# Altium PCB PCB4.PcbDoc
Units mm, origin at the board's own origin, x right, y up, seen from the top; angles counter-clockwise.
Board outline 159.89 x 72.64 mm, 2 copper layers (Top Layer, Bottom Layer); 21 components, 42 nets, 178 pads, 69 vias.
Unrouted connection lines stored in the file: 1.
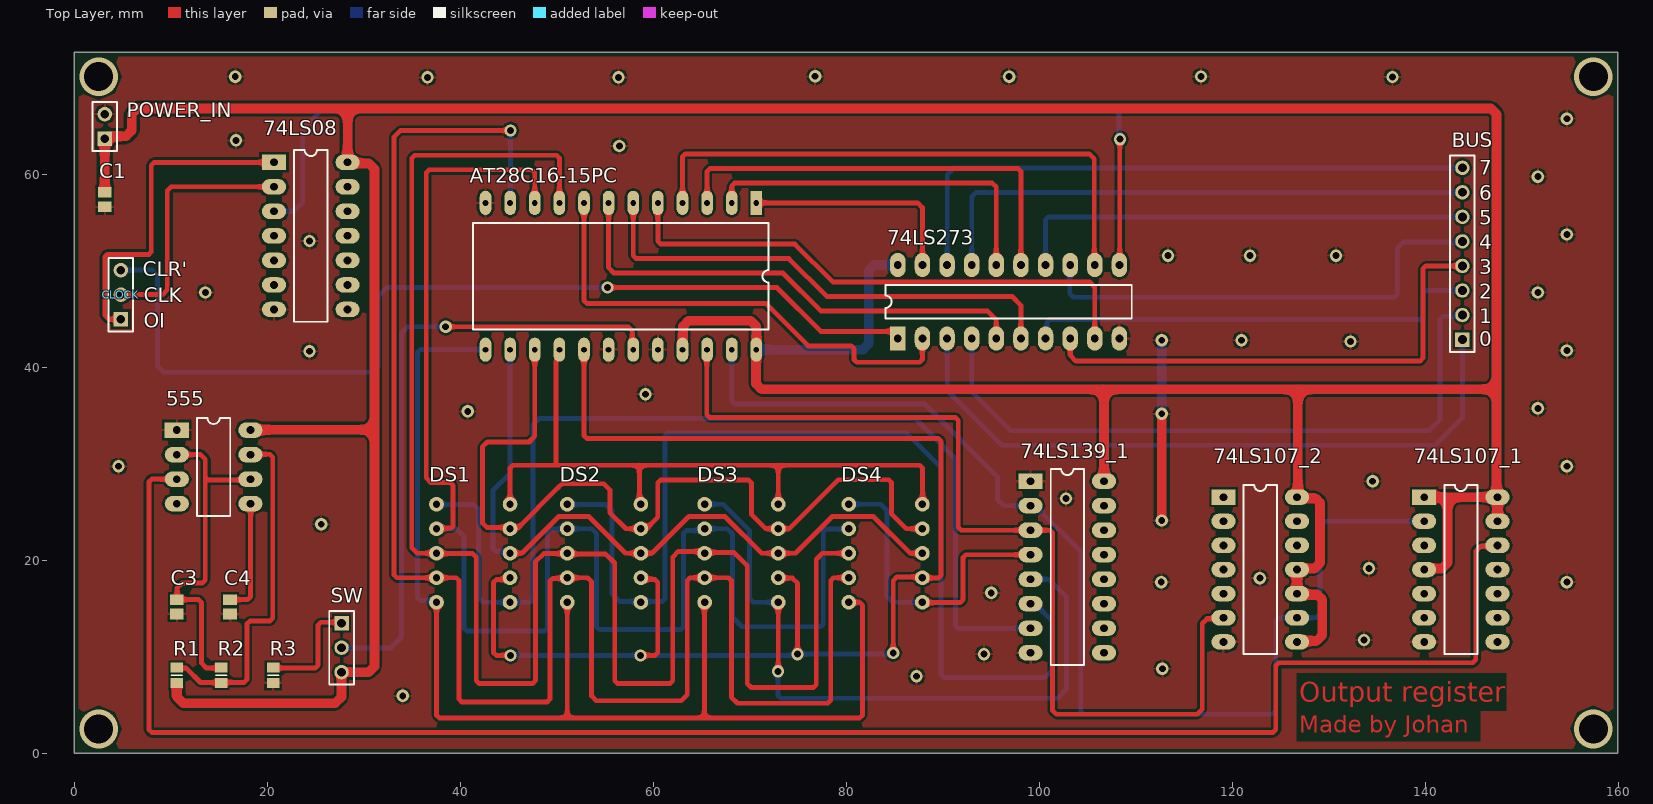
[diagram p0: Top Layer view]
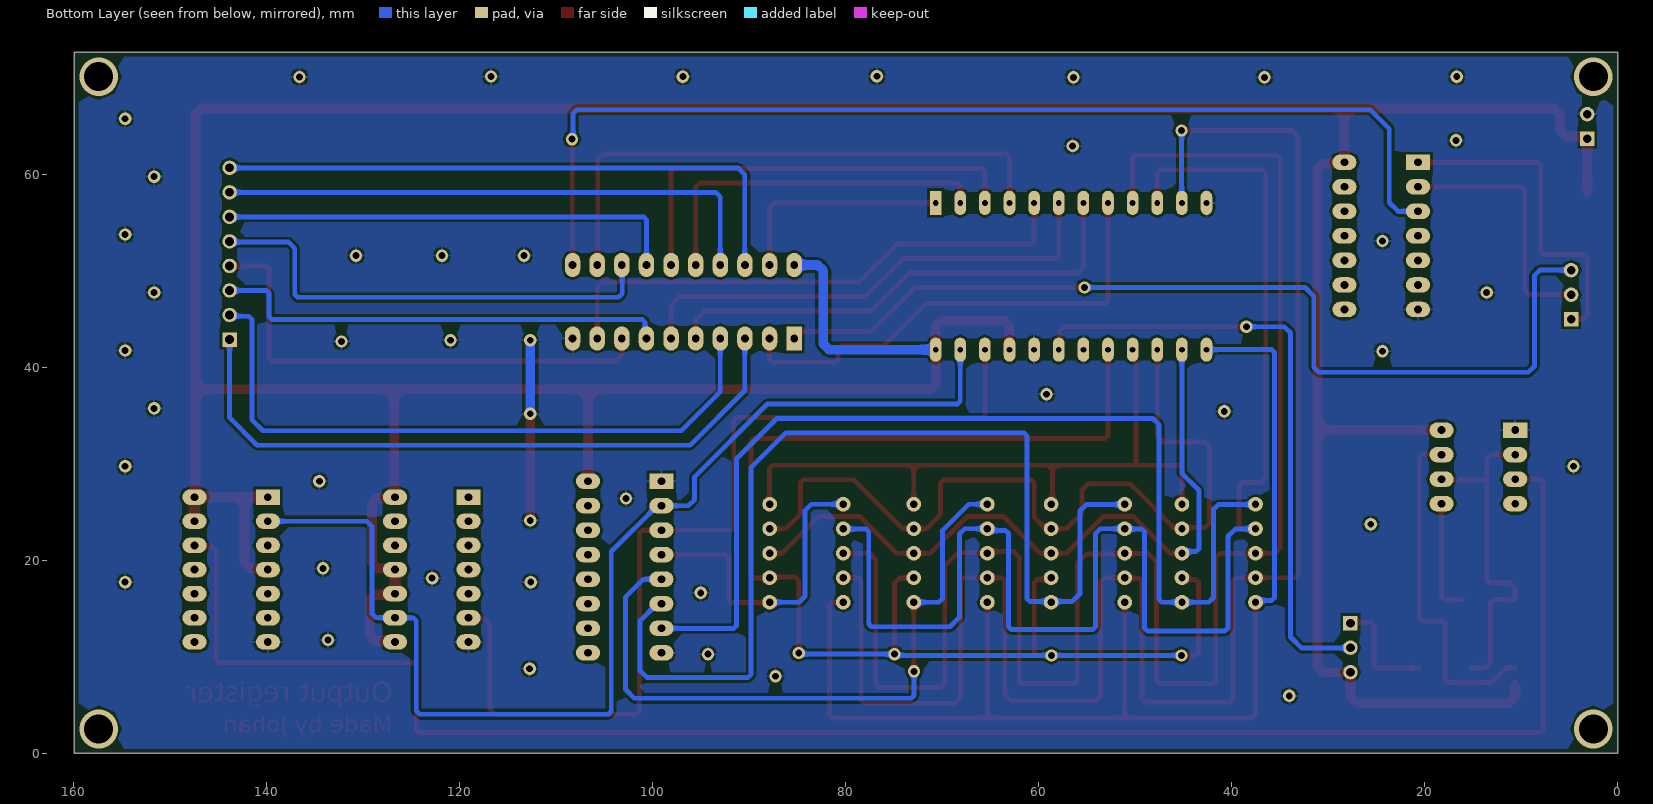
[diagram p1: Bottom Layer view, seen from below]
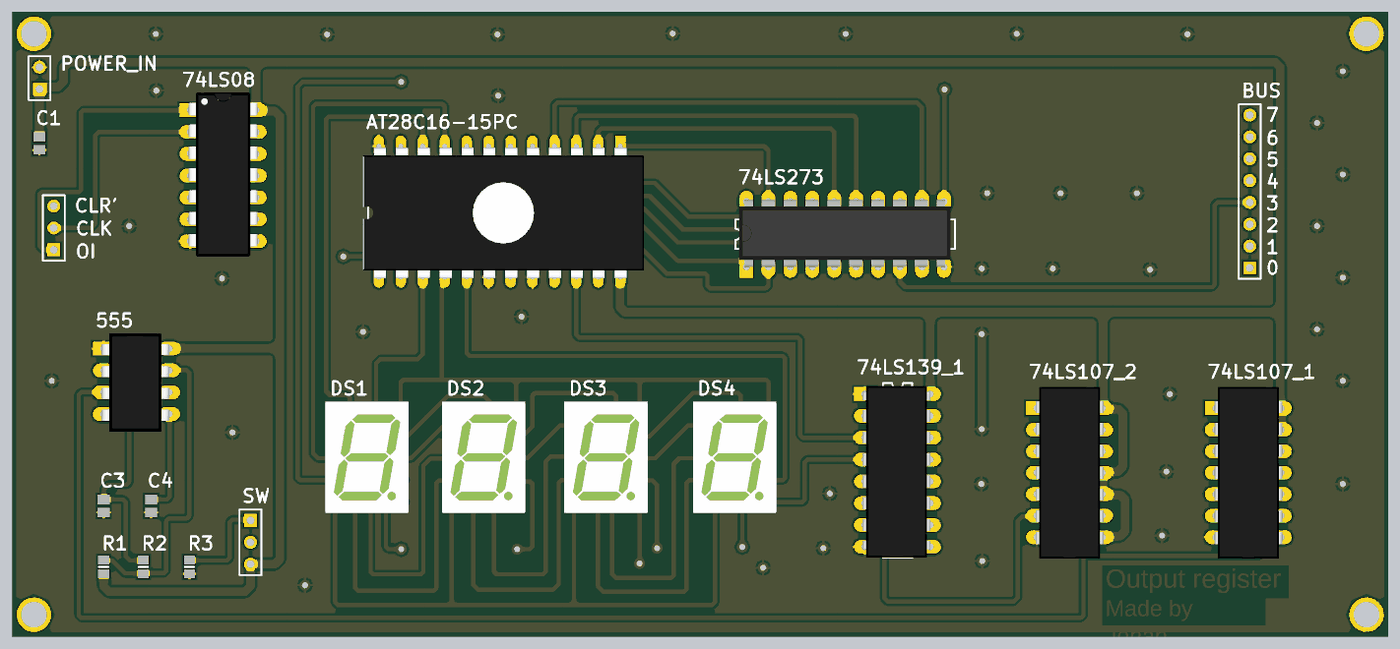
[diagram p2: 3D render of the assembled board from above, using the file's embedded part models]

## Layer stack, top to bottom
Top Solder: solder mask 0.0102, Solder Resist, Dk 3.5
Top Layer: signal copper 0.0356
Dielectric 1: dielectric 0.32, FR-4, Dk 4.8
Bottom Layer: signal copper 0.0356
Bottom Solder: solder mask 0.0102, Solder Resist, Dk 3.5

## Board outline
0,0 159.893,0 159.893,72.644 0,72.644

## Design rules (kind name [scope] priority, off if disabled: settings)
BoardOutlineClearance [All] p1: gap=0.5 ignorepadtopadclearanceinfootprint=FALSE
Clearance [All] p1: gap=0.254 ignorepadtopadclearanceinfootprint=FALSE except(0: Arc-Hole Track-Hole SMDPad-Hole THPad-Hole Via-Hole Fill-Hole Poly-Hole Region-Hole Text-Hole; 0.245: Arc-SMDPad Track-SMDPad; 1: Arc-Arc Arc-Track Track-Track)
PolygonConnect [All] p1: connectstyle=Relief reliefconductorwidth=0.254 reliefentries=4 polygonreliefangle="90 Angle" airgapwidth=0.254
RoutingVias [All] p1: holewidth=0.711 width=1.27 viastyle="Through Hole" minholewidth=0.711 minwidth=1.27 maxholewidth=0.711 maxwidth=1.27
SolderMaskExpansion [All] p1: expansion=0.102 istentingtop=FALSE
Width VCC [InNet('VCC')] p1: maxlimit=2 minlimit=1 preferedwidth=1
Width GND [InNet('GND')] p2: maxlimit=2 minlimit=1 preferedwidth=1
Width [All] p3: maxlimit=1 minlimit=0.5 preferedwidth=0.5
30 further rules are at their usual default settings.

## Classes and differential pairs
component class Sheet1: BUS C1 C3 C4 CLOCK DS1 DS2 DS3 DS4 POWER_IN R1 R2 R3 SW

## Components (designator, comment, footprint, x,y, rotation, side; value= is the part's Value field where it differs from the comment)
74LS08 "DM74LS08N" SN74LS08N 20.708,61.227 r0 top
74LS107_1 "SN74LS107AN" DM74LS107 139.824,26.551 r0 top
74LS107_2 "SN74LS107AN" DM74LS107 119.048,26.551 r0 top
74LS139_1 "SN74LS139AN" SN74LS139AN 99.065,28.209 r0 top
74LS273 "SN74LS273N" SN74LS273N 85.313,42.976 r90 top
555 "NE555P" LM555 10.642,33.493 r0 top
AT28C16-15PC "AT28C16-15PC" AT28C16-15PC 70.662,57.023 r270 top
BUS "Header 8" HDR1X8 143.788,42.872 r90 top
C1 "Cap Pol3" C0805 3.182,57.358 r270 top value=0.1uF
C3 "Cap Pol3" C0805 10.642,15.191 r270 top value=0.01uF
C4 "Cap Pol3" C0805 16.15,15.191 r270 top value=0.01uF
CLOCK "Header 3" HDR1X3 4.845,44.981 r90 top
DS1 "Dpy Red-CA" 7-segment 41.344,20.738 r0 top
DS2 "Dpy Red-CA" 7-segment 54.894,20.738 r0 top
DS3 "Dpy Red-CA" 7-segment 69.116,20.738 r0 top
DS4 "Dpy Red-CA" 7-segment 84.045,20.738 r0 top
POWER_IN "Header 2" HDR1X2 3.182,63.676 r90 top
R1 "Res3" 6-0805_L 10.642,8.099 r270 top value=1K
R2 "Res3" 6-0805_L 15.24,8.099 r90 top value=100K
R3 "Res3" 6-0805_L 20.612,8.099 r270 top value=1K
SW "Header 3" HDR1X3 27.702,13.499 r270 top

## Footprints (in the part's own frame and the unit in brackets; to place one, negate y for a bottom-side part, rotate by r counter-clockwise, add the part's x,y. Pads: shape width x height; smd on the part's side, far side on the other; paste and mask are expansions set on the pad)
6-0805_L [mm] "Chip Resistor, Body 2.0x1.2mm, IPC High Density"
  rect 1x1.3 smd: 1(-0.8,0) 2(0.8,0)
  silkscreen extent 0,-0.55 0,0.55, body extent -1.07,-0.7 1.07,0.7, height 0.7
7-segment [mil]
  round 60 hole 30: 1(-150,200) 2(-150,100) 3(-150,0) 4(-150,-100) 5(-150,-200) 6(150,-200) 7(150,-100) 8(150,0) 9(150,100) 10(150,200)
  body extent -195,-250 187,258, height 295
AT28C16-15PC [mm]
  rect 2.5x1.2 hole 0.6: 1(0,0)
  oval 2.5x1.2 hole 0.6: 2(0,-2.55) 3(0,-5.1) 4(0,-7.65) 5(0,-10.2) 6(0,-12.75) 7(0,-15.3) 8(0,-17.85) 9(0,-20.4) 10(0,-22.95) 11(0,-25.5) 12(0,-28.05) 13(15.2,-28.05) 14(15.2,-25.5) 15(15.2,-22.95) 16(15.2,-20.4) 17(15.2,-17.85) 18(15.2,-15.3) 19(15.2,-12.75) 20(15.2,-10.2) 21(15.2,-7.65) 22(15.2,-5.1) 23(15.2,-2.55) 24(15.2,0)
  silkscreen extent 2.08,-29.32 13.12,1.27, body extent 0.13,-29.91 15.37,2.73, height 6.29
C0805 [mm] "Chip Capacitor, Body 2.0x1.3mm, IPC High Density"
  rect 1.1x1.4 smd: 1(-0.75,0) 2(0.75,0)
  body extent -1.1,-0.72 1.1,0.72, height 1.4
DM74LS107 [mm]
  rect 2.5x1.6 / inner rect 2.5x1.2 / far side rect 2.5x1.6 hole 0.8: 1(0,0)
  oval 2.5x1.6 / inner oval 2.5x1.2 / far side oval 2.5x1.6 hole 0.8: 2(0,-2.5) 3(0,-5) 4(0,-7.5) 5(0,-10) 6(0,-12.5) 7(0,-15) 8(7.6,-15) 9(7.6,-12.5) 10(7.6,-10) 11(7.6,-7.5) 12(7.6,-5) 13(7.6,-2.5) 14(7.6,0)
  silkscreen extent 2.08,-16.25 5.52,1.25, body extent -0.12,-17.49 7.75,2.51, height 5.6
HDR1X2 [mm] "Connector; Header; 2 Position"
  rect 1.5x1.5 hole 0.9: 1(0,0)
  round 1.5 hole 0.9: 2(2.54,0)
  silkscreen extent -1.27,-1.27 3.81,1.27
HDR1X3 [mm] "Connector; Header; 3 Position"
  rect 1.5x1.5 hole 0.9: 1(0,0)
  round 1.5 hole 0.9: 2(2.54,0) 3(5.08,0)
  silkscreen extent -1.27,-1.27 6.35,1.27
HDR1X8 [mm] "Connector; Header; 8 Position"
  rect 1.5x1.5 hole 0.9: 1(0,0)
  round 1.5 hole 0.9: 2(2.54,0) 3(5.08,0) 4(7.62,0) 5(10.16,0) 6(12.7,0) 7(15.24,0) 8(17.78,0)
  silkscreen extent -1.27,-1.27 19.05,1.27
LM555 [mm]
  rect 2.5x1.6 hole 0.8: 1(0,0)
  oval 2.5x1.6 hole 0.8: 2(0,-2.54) 3(0,-5.08) 4(0,-7.62) 5(7.62,-7.62) 6(7.62,-5.08) 7(7.62,-2.54) 8(7.62,0)
  silkscreen extent 2.08,-8.89 5.54,1.27, body extent -0.25,-9.65 14.6,1.78, height 4.69
SN74LS08N [mm]
  rect 2.5x1.6 hole 0.8: 1(0,0)
  oval 2.5x1.6 hole 0.8: 2(0,-2.54) 3(0,-5.08) 4(0,-7.62) 5(0,-10.16) 6(0,-12.7) 7(0,-15.24) 8(7.62,-15.24) 9(7.62,-12.7) 10(7.62,-10.16) 11(7.62,-7.62) 12(7.62,-5.08) 13(7.62,-2.54) 14(7.62,0)
  silkscreen extent 2.08,-16.51 5.54,1.27, body extent -0.19,-17.02 11.18,2.03, height 4.51
SN74LS139AN [mm]
  rect 2.5x1.6 / inner rect 2.5x1.2 / far side rect 2.5x1.6 hole 0.8: 1(0,0)
  oval 2.5x1.6 / inner oval 2.5x1.2 / far side oval 2.5x1.6 hole 0.8: 2(0,-2.54) 3(0,-5.08) 4(0,-7.62) 5(0,-10.16) 6(0,-12.7) 7(0,-15.24) 8(0,-17.78) 9(7.6,-17.78) 10(7.6,-15.24) 11(7.6,-12.7) 12(7.6,-10.16) 13(7.6,-7.62) 14(7.6,-5.08) 15(7.6,-2.54) 16(7.6,0)
  silkscreen extent 2.08,-19.05 5.52,1.27, body extent -0.25,-19.05 7.62,0.95, height 5.6
SN74LS273N [mm]
  rect 2.5x1.6 hole 0.8: 1(0,0)
  oval 2.5x1.6 hole 0.8: 2(0,-2.55) 3(0,-5.1) 4(0,-7.65) 5(0,-10.2) 6(0,-12.75) 7(0,-15.3) 8(0,-17.85) 9(0,-20.4) 10(0,-22.95) 11(7.62,-22.95) 12(7.62,-20.4) 13(7.62,-17.85) 14(7.62,-15.3) 15(7.62,-12.75) 16(7.62,-10.2) 17(7.62,-7.65) 18(7.62,-5.1) 19(7.62,-2.55) 20(7.62,0)
  silkscreen extent 2.08,-24.22 5.54,1.27, body extent 0,-23.73 7.87,0.87, height 4.86

## Part data
74LS08: "IC GATE AND 4CH 2-INP 14-DIP", Case/Package=DIP, High Level Output Current=-400uA, Low Level Output Current=8mA, Manufacturer="ON Semiconductor / Fairchild", Max Operating Temperature=70°C, Max Supply Voltage=5.25V, Min Operating Temperature=0°C, Min Supply Voltage=4.75V, Package Quantity=25, Supplier Part Number 1=512-DM74LS08N, Category="Logic Gates", ComponentLink1Description=https://datasheet.ciiva.com/4825/74ls08-196234-4825713.pdf?src-supplier=Mouser, ComponentLink1URL=https://datasheet.ciiva.com/4825/74ls08-196234-4825713.pdf?src-supplier=Mouser, ComponentLink2Description=https://datasheet.ciiva.com/1877/dm74ls08-1877307.pdf?src-supplier=Digi-Key, ComponentLink2URL=https://datasheet.ciiva.com/1877/dm74ls08-1877307.pdf?src-supplier=Digi-Key, Lead Free="Contains Lead", Logic Function=AND, Manufacturer Part Number=DM74LS08N, Mount="Through Hole", Number of Circuits=4, Number of Gates=4, Number of Inputs=2, Number of Pins=14, Packaging=Rail/Tube, Propagation Delay=18ns, RoHS=Yes, Supplier 1=Mouser
74LS107_1 74LS107_2: "Flip Flop JK-Type Neg-Edge 2-Element 14-Pin PDIP Tube", Case/Package=PDIP, Frequency=45MHz, High Level Output Current=-400uA, Low Level Output Current=8mA, Manufacturer="Texas Instruments", Max Operating Temperature=70°C, Max Supply Voltage=5.25V, Min Operating Temperature=0°C, Min Supply Voltage=4.75V, Nominal Supply Current=100uA, Operating Supply Voltage=5V, Package Quantity=25, Supplier Part Number 1=95M4428, Clock Edge Trigger Type="Negative Edge,Positive Edge", ComponentLink1Description=https://www.distrelec.biz/Web/Downloads/_t/ds/sn74ls107a_eng_tds.pdf?mime=application%2Fpdf&src-supplier=Distrelec, ComponentLink1URL=https://www.distrelec.biz/Web/Downloads/_t/ds/sn74ls107a_eng_tds.pdf?mime=application%2Fpdf&src-supplier=Distrelec, ComponentLink2Description=http://focus.ti.com/lit/ds/symlink/sn74107.pdf?src-supplier=Avnet+Europe, ComponentLink2URL=http://focus.ti.com/lit/ds/symlink/sn74107.pdf?src-supplier=Avnet+Europe, ComponentLink3Description=http://www.ti.com/general/docs/lit/getliterature.tsp?genericPartNumber=SN74LS107A&&fileType=pdf&src-supplier=Avnet, ComponentLink3URL=http://www.ti.com/general/docs/lit/getliterature.tsp?genericPartNumber=SN74LS107A&&fileType=pdf&src-supplier=Avnet, ComponentLink4Description=https://source.z2data.com/2016/10/12/6/26/54/563/639426/sn74107.pdf?src-supplier=Digi-Key, ComponentLink4URL=https://source.z2data.com/2016/10/12/6/26/54/563/639426/sn74107.pdf?src-supplier=Digi-Key, ComponentLink5Description=http://www.farnell.com/datasheets/1967736.pdf?src-supplier=Element14, ComponentLink5URL=http://www.farnell.com/datasheets/1967736.pdf?src-supplier=Element14, ComponentLink6Description=https://www.verical.com/server-webapp/html/getDatasheet?partID=250176&src-supplier=Verical, ComponentLink6URL=https://www.verical.com/server-webapp/html/getDatasheet?partID=250176&src-supplier=Verical, Height=4.57mm, Lead Free="Lead Free", Length=19.69mm, Logic Function=Flip-Flop,JK-Type, Manufacturer Part Number=SN74LS107AN, Max Frequency=45MHz, Mount="Through Hole", Number of Bits=2, Number of Bits per Element=1, Number of Circuits=2, Number of Elements=2, Number of Input Lines=4, Number of Output Lines=2, Number of Pins=14, Output Current=8mA, Output Type=TTL, Packaging=Rail/Tube, Polarity=Non-Inverting, Propagation Delay=20ns, Radiation Hardening=No, REACH SVHC="No SVHC", Stock 1=0, Supplier 1=Newark, Turn-On Delay Time=15ns, Weight=0.032734oz, Width=6.6mm
74LS139_1: "TEXAS INSTRUMENTS         SN74LS139AN            IC, DECODER/DEMUX, 74LS139", Case/Package=PDIP, High Level Output Current=-400uA, Low Level Output Current=8mA, Manufacturer="Texas Instruments", Max Operating Temperature=70°C, Max Power Dissipation=200mW, Max Supply Voltage=5.25V, Min Operating Temperature=0°C, Min Supply Voltage=4.75V, Nominal Supply Current=100uA, Operating Supply Voltage=5V, Package Quantity=25, Supplier Part Number 1=308253, Bandwidth=35MHz, ComponentLink1Description=http://www.farnell.com/datasheets/2018724.pdf?src-supplier=Element14, ComponentLink1URL=http://www.farnell.com/datasheets/2018724.pdf?src-supplier=Element14, ComponentLink2Description=https://www.distrelec.biz/Web/Downloads/57/06/lm645706.pdf?mime=application%2Fpdf&src-supplier=Distrelec, ComponentLink2URL=https://www.distrelec.biz/Web/Downloads/57/06/lm645706.pdf?mime=application%2Fpdf&src-supplier=Distrelec, ComponentLink3Description=http://www.ti.com/lit/ds/symlink/sn74s139a.pdf?src-supplier=Digi-Key, ComponentLink3URL=http://www.ti.com/lit/ds/symlink/sn74s139a.pdf?src-supplier=Digi-Key, ComponentLink4Description=https://www.verical.com/server-webapp/html/getDatasheet?partID=83287&src-supplier=Verical, ComponentLink4URL=https://www.verical.com/server-webapp/html/getDatasheet?partID=83287&src-supplier=Verical, Height=4.57mm, Independent Circuits=2, Lead Free="Lead Free", Length=19.3mm, Logic Function=Demultiplexer,Decoder, Manufacturer Part Number=SN74LS139AN, Mount="Through Hole", Number of Bits=4, Number of Channels=2, Number of Circuits=2, Number of Elements=2, Number of Input Lines=2, Number of Inputs=2, Number of Output Lines=4, Number of Outputs=4, Number of Pins=16, Packaging=Rail/Tube, Polarity=Inverting, Propagation Delay=33ns, Radiation Hardening=No, REACH SVHC="No SVHC", Stock 1=0, Supplier 1=RSComponents, Supply Type=Single, Throw Configuration=DP4T, Turn-On Delay Time=38ns, Weight=0.03357oz, Width=6.35mm
74LS273: "IC D-TYPE POS TRG SNGL 20DIP", Case/Package=PDIP, Frequency=40MHz, High Level Output Current=-400uA, Low Level Output Current=8mA, Manufacturer="Texas Instruments", Max Operating Temperature=70°C, Max Supply Voltage=5.25V, Min Operating Temperature=0°C, Min Supply Voltage=4.75V, Operating Supply Voltage=5V, Package Quantity=20, Supplier Part Number 1=0308354, Clock Edge Trigger Type="Positive Edge", ComponentLink1Description=https://www.distrelec.biz/Web/Downloads/14/_e/kg645614_E.pdf?mime=application%2Fpdf&src-supplier=Distrelec, ComponentLink1URL=https://www.distrelec.biz/Web/Downloads/14/_e/kg645614_E.pdf?mime=application%2Fpdf&src-supplier=Distrelec, ComponentLink2Description=http://focus.ti.com/lit/ds/symlink/sn74273.pdf?src-supplier=Avnet+Europe, ComponentLink2URL=http://focus.ti.com/lit/ds/symlink/sn74273.pdf?src-supplier=Avnet+Europe, ComponentLink3Description=http://www.ti.com/lit/ds/symlink/sn74ls273.pdf?src-supplier=Digi-Key, ComponentLink3URL=http://www.ti.com/lit/ds/symlink/sn74ls273.pdf?src-supplier=Digi-Key, ComponentLink4Description=https://www.verical.com/server-webapp/html/getDatasheet?partID=250181&src-supplier=Verical, ComponentLink4URL=https://www.verical.com/server-webapp/html/getDatasheet?partID=250181&src-supplier=Verical, ComponentLink5Description=http://datasheet.iiic.cc/texas_instruments/SN74LS273N.pdf?src-supplier=IIIC, ComponentLink5URL=http://datasheet.iiic.cc/texas_instruments/SN74LS273N.pdf?src-supplier=IIIC, ComponentLink6Description=http://www.produktinfo.conrad.com/datenblaetter/175000-199999/175129-da-01-en-LOGIK_IC_SN_74_LS_273_N_DIP20__TID.pdf?src-supplier=Conrad, ComponentLink6URL=http://www.produktinfo.conrad.com/datenblaetter/175000-199999/175129-da-01-en-LOGIK_IC_SN_74_LS_273_N_DIP20__TID.pdf?src-supplier=Conrad, ComponentLink7Description=http://www.produktinfo.conrad.com/datenblaetter/1000000-1099999/001016947-da-01-en-IC_DTPE_POS_TRG_S_SN74LS273N_PDIP_20_TID.pdf?src-supplier=Conrad, ComponentLink7URL=http://www.produktinfo.conrad.com/datenblaetter/1000000-1099999/001016947-da-01-en-IC_DTPE_POS_TRG_S_SN74LS273N_PDIP_20_TID.pdf?src-supplier=Conrad, Height=4.57mm, Lead Free="Contains Lead", Length=24.33mm, Logic Function=D-Type,Flip-Flop, Manufacturer Part Number=SN74LS273N, Max Frequency=40MHz, Mount="Through Hole", Number of Bits=8, Number of Bits per Element=8, Number of Channels=8, Number of Circuits=8, Number of Elements=1, Number of Input Lines=2, Number of Output Lines=1, Number of Pins=20, Output Current=8mA, Output Type=TTL, Packaging=Rail/Tube, Polarity=Non-Inverting, Propagation Delay=27ns, Radiation Hardening=No, REACH SVHC="No SVHC", Stock 1=0, Supplier 1=RSComponents, Turn-On Delay Time=17ns, Weight=0.042297oz, Width=6.35mm
555: "TEXAS INSTRUMENTS         NE555P            TIMER SINGLE PRECISION,DIP8 ,0.5MHZ", Case/Package=PDIP, Current Rating=10mA, Frequency=500kHz, High Level Output Current=-200mA, Low Level Output Current=200mA, Manufacturer="Texas Instruments", Max Operating Temperature=70°C, Max Supply Voltage=16V, Min Operating Temperature=0°C, Min Supply Voltage=4.5V, Nominal Supply Current=2mA, Operating Supply Voltage=5V, Package Quantity=50, Quiescent Current=15mA, Supplier Part Number 1=296-NE555P-ND, Category="Clock and Timing", ComponentLink1Description=https://datasheet.ciiva.com/19457/904085-19457361.pdf?src-supplier=Jameco, ComponentLink1URL=https://datasheet.ciiva.com/19457/904085-19457361.pdf?src-supplier=Jameco, ComponentLink2Description=https://datasheet.ciiva.com/1139/sa555-1139904.pdf?src-supplier=Element14, ComponentLink2URL=https://datasheet.ciiva.com/1139/sa555-1139904.pdf?src-supplier=Element14, ComponentLink3Description=https://datasheet.ciiva.com/26325/152184-da-01-en-ne555p-timer-tid-26325915.pdf?src-supplier=Conrad, ComponentLink3URL=https://datasheet.ciiva.com/26325/152184-da-01-en-ne555p-timer-tid-26325915.pdf?src-supplier=Conrad, ComponentLink4Description=https://datasheet.ciiva.com/1147/1764032-1147750.pdf?src-supplier=Newark, ComponentLink4URL=https://datasheet.ciiva.com/1147/1764032-1147750.pdf?src-supplier=Newark, ComponentLink5Description=https://datasheet.ciiva.com/14094/ne555-series-eng-tds-14094950.pdf?src-supplier=Distrelec, ComponentLink5URL=https://datasheet.ciiva.com/14094/ne555-series-eng-tds-14094950.pdf?src-supplier=Distrelec, ComponentLink6Description=https://datasheet.ciiva.com/14274/ne555-14274456.pdf?src-supplier=Avnet, ComponentLink6URL=https://datasheet.ciiva.com/14274/ne555-14274456.pdf?src-supplier=Avnet, ComponentLink7Description=https://datasheet.ciiva.com/15152/getdatasheetpartid-248510-15152620.pdf?src-supplier=Verical, ComponentLink7URL=https://datasheet.ciiva.com/15152/getdatasheetpartid-248510-15152620.pdf?src-supplier=Verical, ComponentLink8Description=https://datasheet.ciiva.com/1233/ne555-1233454.pdf?src-supplier=Digi-Key, ComponentLink8URL=https://datasheet.ciiva.com/1233/ne555-1233454.pdf?src-supplier=Digi-Key, ComponentLink9Description=https://datasheet.ciiva.com/26228/ne555-26228892.pdf?src-supplier=Avnet+Europe, ComponentLink9URL=https://datasheet.ciiva.com/26228/ne555-26228892.pdf?src-supplier=Avnet+Europe, Contact Plating=Gold, Height=4.57mm, Lead Free="Lead Free", Length=9.81mm, Manufacturer Part Number=NE555P, Mount="Through Hole", Number of Pins=8, Number of Timers/Counters=1, Operating Supply Current=10mA, Packaging=Rail/Tube, Pricing 1="1=0,45000, 10=0,34200, 25=0,30800, 100=0,21280, 250=0,17920, 500=0,14560, 1000=0,11200, 2500=0,10080, 5000=0,09520 (USD)", Radiation Hardening=No, REACH SVHC="No SVHC", RoHS=Yes, Stock 1=8033, Supplier 1=Digi-Key, Weight=0.015535oz, Width=6.35mm
AT28C16-15PC: Case/Package=DIP, Frequency=150GHz, Manufacturer="Microchip / Atmel", Max Operating Temperature=70°C, Max Supply Voltage=5.5V, Min Operating Temperature=0°C, Min Supply Voltage=4.5V, Nominal Supply Current=30mA, Operating Supply Voltage=5V, Package Quantity=16, Supplier Part Number 1=AT28C16-15PC-ND, Access Time=150ns, ComponentLink1Description=http://www.atmel.com/Images/doc0540.pdf?src-supplier=Digi-Key, ComponentLink1URL=http://www.atmel.com/Images/doc0540.pdf?src-supplier=Digi-Key, ComponentLink2Description=http://components.arrow.com/part/dataview/66884S2427492N3744?src-supplier=Arrow, ComponentLink2URL=http://components.arrow.com/part/dataview/66884S2427492N3744?src-supplier=Arrow, Density=16Kb, Interface=Parallel, Lead Free="Contains Lead", Manufacturer Part Number=AT28C16-15PC, Memory Size=16Kb, Memory Type=EEPROM, Mount="Through Hole", Number of Pins=24, Packaging=Rail/Tube, Stock 1=0, Supplier 1=Digi-Key
BUS: "Header, 8-Pin", LatestRevisionDate=17-Jul-2002, LatestRevisionNote="Re-released for DXP Platform.", Publisher="Altium Limited"
C1 C3 C4: "Polarized Capacitor (Surface Mount)", LatestRevisionDate=29-May-2009, LatestRevisionNote="IPC-7351 Footprint Added.", PackageDescription="Chip Capacitor", PackageReference=C0805, Published=8-Jun-2000, Publisher="Altium Limited"
CLOCK SW: "Header, 3-Pin", LatestRevisionDate=17-Jul-2002, LatestRevisionNote="Re-released for DXP Platform.", Publisher="Altium Limited"
DS1 DS2 DS3 DS4: "7.62 mm Black Surface HER 7-Segment Display: CA, RH DP", Colour="High Efficiency Red (HER)", ComponentLink1Description="Manufacturer Link", ComponentLink1URL=http://www.agilent.com/, DatasheetVersion=19-Feb-2002, LatestRevisionDate=17-Dec-2003, LatestRevisionNote="Schematic revised, PCB Footprint replaced.", MinimumIntensity="360 ucd", Note="IF = 5 mA", PackageDescription="LED, 7-Segment Display, 7.62 mm, RHD; 10 Leads; Row Space 5.08 mm; Pitch 2.54 mm", PackageReference=A, PackageVersion=11-Feb-2002, Published=8-Jun-2000, Publisher="Altium Limited"
POWER_IN: "Header, 2-Pin", LatestRevisionDate=17-Jul-2002, LatestRevisionNote="Re-released for DXP Platform.", Publisher="Altium Limited"
R1 R2 R3: "Resistor", LatestRevisionDate=29-May-2009, LatestRevisionNote="IPC-7351 Footprint Added.", PackageDescription="Chip Resistor", PackageReference=J1-0603, Published=8-Jun-2000, Publisher="Altium Limited"

## Via types
v1: diameter 1.27, hole 0.711, Top Layer to Bottom Layer, tented both sides, 65 vias
v2: diameter 4, hole 3, Top Layer to Bottom Layer, 4 vias

## Nets (pads, with @x,y where several pads share a name; then routed paths per layer and width w, separated by ;. In a path a pad name is that pad's centre, name@x,y a point inside that pad or via, vN(x,y) a via of type N, cw(c..) or ccw(c..) an arc to the next point about the centre after c; other vN are vias at no path point)
GND: 74LS08.7 74LS107_1.7 74LS107_2.7 74LS139_1.1 74LS139_1.8 74LS273.10 555.1 AT28C16-15PC.12 AT28C16-15PC.18 AT28C16-15PC.20 C1.2 C3.2 C4.2 POWER_IN.2 R3.2 | length 18.7
  Top Layer w1: v1(112.649,24.13) v1(112.649,35.179)
  Bottom Layer w1: v1(112.649,35.179) v1(112.649,42.799)
  other v1: 34.036,5.969 87.249,8.001 112.71,8.777 94.234,10.287 133.6,11.743 133.6,11.743 94.996,16.637 112.6,17.743 112.6,17.743 154.6,17.743 154.6,17.743 122.809,18.161 134.112,19.177 25.6,23.743 25.6,23.743 102.743,26.416 134.493,28.194 4.6,29.743 4.6,29.743 154.6,29.743 154.6,29.743 40.767,35.433 151.6,35.743 151.6,35.743 59.182,37.211 24.384,41.656 154.6,41.743 154.6,41.743 132.207,42.672 120.904,42.799 13.6,47.743 13.6,47.743 151.6,47.743 151.6,47.743 113.284,51.562 121.793,51.562 130.683,51.562 24.384,53.086 154.6,53.743 154.6,53.743 151.6,59.743 151.6,59.743 56.475,62.909 16.764,63.5 154.6,65.743 154.6,65.743 36.603,70.022 56.397,70.022 136.544,70.06 16.698,70.097 96.844,70.097 116.713,70.104 76.752,70.134
Net74LS08_1: 74LS08.1 CLOCK.1 | length 34.8
  Top Layer w0.5: CLOCK.1 3.598,44.981 3.182,45.397 3.182,51.442 3.429,51.689 7.747,51.689 8.001,51.943 8.001,60.921 8.294,61.214 20.695,61.214 74LS08.1 74LS08.1@20.679,61.256
Net74LS08_2: 74LS08.2 CLOCK.2 | length 26.7
  Top Layer w0.5: CLOCK.2 9.167,47.521 9.652,48.006 9.652,58.293 10.046,58.687 74LS08.2 74LS08.2@20.556,58.535
Net74LS08_3: 74LS08.3 74LS273.11 | length 112.4
  Top Layer w0.5: 74LS273.11 108.297,50.63 108.297,63.593 v1(108.331,63.627)
  Bottom Layer w0.5: 74LS08.3 22.77,56.147 23.688,57.065 23.688,64.709 25.654,66.675 107.823,66.675 108.204,66.294 108.204,63.754 v1(108.331,63.627) ; 74LS273.11@108.204,50.655 74LS273.11
Net74LS107_1_2: 74LS107_1.2 74LS107_2.9 74LS139_1.2 AT28C16-15PC.23 | length 120.6
  Bottom Layer w0.5: AT28C16-15PC.23 68.112,36.488 68.405,36.195 88.086,36.195 95.631,28.65 95.631,26.289 96.266,25.654 99.05,25.654 74LS139_1.2 99.515,25.669 104.267,20.917 104.267,4.357 104.56,4.064 124.079,4.064 124.46,4.445 124.46,13.759 124.753,14.051 74LS107_2.9 128.605,14.051 129.032,14.478 129.032,23.495 129.588,24.051 74LS107_1.2
Net74LS107_1_12: 74LS107_1.12 555.3 | length 187
  Top Layer w0.5: 555.3 8.04,28.413 7.747,28.12 7.747,2.476 8.04,2.183 124.167,2.183 124.46,2.476 124.46,9.105 124.753,9.398 144.868,9.398 145.161,9.691 145.161,20.955 145.669,21.463 147.336,21.463 74LS107_1.12
Net74LS107_2_6: 74LS107_2.6 74LS139_1.3 AT28C16-15PC.22 | length 99.7
  Top Layer w0.5: AT28C16-15PC.22 65.532,41.793 65.532,35.091 65.825,34.798 91.274,34.798 91.567,34.505 91.567,23.422 91.86,23.129 101.053,23.129 101.346,22.836 101.346,4.445 101.727,4.064 116.332,4.064 116.84,4.572 116.84,13.462 117.348,13.97 118.967,13.97 74LS107_2.6
Net74LS139_1_4: 74LS139_1.4 DS4.1 DS4.6 | length 32.9
  Top Layer w0.5: DS4.6 87.893,15.621 91.782,15.621 92.075,15.914 92.075,20.296 92.368,20.589 74LS139_1.4
  Bottom Layer w0.5: DS4.1 83.529,25.818 84.2,25.147 84.2,18.044 84.201,18.043 84.201,16.256 84.799,15.658 DS4.6
Net74LS139_1_5: 74LS139_1.5 DS3.1 DS3.6 | length 70.1
  Top Layer w0.5: v1(72.898,8.509) 72.926,8.537 DS3.6
  Bottom Layer w0.5: DS3.1 67.235,25.818 69.965,23.088 69.965,16.014 70.321,15.658 DS3.6 ; v1(72.898,8.509) 72.898,6.008 73.191,5.715 101.854,5.715 102.767,6.628 102.767,16.232 100.95,18.049 74LS139_1.5
Net74LS139_1_6: 74LS139_1.6 DS2.1 DS2.6 | length 107.9
  Bottom Layer w0.5: DS2.1 51.121,25.781 55.052,25.781 55.709,25.123 55.709,16.554 56.515,15.748 58.704,15.748 60.921,15.748 61.214,16.041 61.214,32.902 61.507,33.195 86.185,33.195 89.789,29.591 89.789,8.167 90.082,7.874 100.584,7.874 101.267,8.557 101.267,13.757 99.515,15.509 74LS139_1.6
Net74LS139_1_7: 74LS139_1.7 DS1.1 DS1.6 | length 108.7
  Bottom Layer w0.5: DS1.1 37.572,25.781 41.402,25.781 41.886,25.297 41.886,16.153 42.381,15.658 47.229,15.658 47.522,15.951 47.522,34.06 48.157,34.695 87.098,34.695 91.289,30.504 91.289,13.247 91.582,12.954 99.05,12.954 74LS139_1.7
Net74LS273_1: 74LS273.1 CLOCK.3 | length 100.6
  Top Layer w0.5: v1(55.245,48.26) 72.795,48.26 77.343,43.712 84.763,43.712 85.313,43.162 74LS273.1
  Bottom Layer w0.5: CLOCK.3 8.105,50.061 8.636,49.53 8.636,40.132 9.29,39.478 30.969,39.478 31.496,40.005 31.496,47.371 32.385,48.26 v1(55.245,48.26)
Net74LS273_2: 74LS273.2 AT28C16-15PC.8 | length 50.8
  Top Layer w0.5: AT28C16-15PC.8 52.812,46.902 53.105,46.609 71.628,46.609 76.025,42.212 80.479,42.212 80.772,41.919 80.772,40.806 81.065,40.513 87.57,40.513 87.863,40.806 74LS273.2
Net74LS273_3: 74LS273.3 BUS.1 | length 70.4
  Bottom Layer w0.5: 74LS273.3 90.424,42.965 90.424,37.592 96.087,31.929 140.945,31.929 143.788,34.772 BUS.1
Net74LS273_4: 74LS273.4 BUS.2 | length 69
  Bottom Layer w0.5: 74LS273.4 92.964,42.975 92.964,37.465 97,33.429 140.324,33.429 141.478,34.583 141.478,44.958 141.807,45.287 143.663,45.287 BUS.2
Net74LS273_5: 74LS273.5 AT28C16-15PC.7 | length 51
  Top Layer w0.5: AT28C16-15PC.7 55.362,50.302 55.904,49.76 73.416,49.76 77.334,45.842 94.59,45.842 95.513,44.919 74LS273.5
Net74LS273_6: 74LS273.6 AT28C16-15PC.6 | length 51.2
  Top Layer w0.5: AT28C16-15PC.6 57.912,51.553 58.205,51.26 74.038,51.26 77.956,47.342 97.14,47.342 98.063,46.419 74LS273.6
Net74LS273_7: 74LS273.7 BUS.3 | length 47.5
  Bottom Layer w0.5: 74LS273.7 100.768,43.131 100.768,44.665 101.061,44.958 139.407,44.958 139.7,45.251 139.7,47.659 139.993,47.952 BUS.3
Net74LS273_8: 74LS273.8 BUS.4 | length 52.1
  Top Layer w0.5: 74LS273.8 103.163,41.236 103.759,40.64 139.407,40.64 139.7,40.933 139.7,50.199 139.993,50.492 BUS.4
Net74LS273_9: 74LS273.9 AT28C16-15PC.5 | length 56.5
  Top Layer w0.5: AT28C16-15PC.5 60.462,53.053 60.755,52.76 74.659,52.76 78.577,48.842 105.172,48.842 105.713,48.302 74LS273.9
Net74LS273_12: 74LS273.12 AT28C16-15PC.4 | length 58.8
  Top Layer w0.5: AT28C16-15PC.4 63.012,61.81 63.305,62.103 105.156,62.103 105.664,61.595 105.664,50.645 74LS273.12
Net74LS273_13: 74LS273.13 BUS.5 | length 49
  Bottom Layer w0.5: 74LS273.13 103.124,50.557 103.124,47.625 103.505,47.244 136.74,47.244 137.033,47.537 137.033,52.324 137.668,52.959 143.716,52.959 BUS.5
Net74LS273_14: 74LS273.14 BUS.6 | length 48
  Bottom Layer w0.5: 74LS273.14 100.613,55.279 100.905,55.572 BUS.6
Net74LS273_15: 74LS273.15 AT28C16-15PC.3 | length 45.7
  Top Layer w0.5: AT28C16-15PC.3 65.562,60.286 65.855,60.579 97.77,60.579 98.063,60.286 74LS273.15
Net74LS273_16: 74LS273.16 AT28C16-15PC.2 | length 37.5
  Top Layer w0.5: AT28C16-15PC.2 68.112,58.786 68.405,59.079 95.099,59.079 95.504,58.674 95.504,50.605 74LS273.16
Net74LS273_17: 74LS273.17 BUS.7 | length 58.1
  Bottom Layer w0.5: 74LS273.17 92.964,50.597 92.964,57.658 93.418,58.112 BUS.7
Net74LS273_18: 74LS273.18 BUS.8 | length 63
  Bottom Layer w0.5: 74LS273.18 90.424,50.607 90.424,59.944 91.132,60.652 BUS.8
Net74LS273_19: 74LS273.19 AT28C16-15PC.1 | length 23.3
  Top Layer w0.5: AT28C16-15PC.1 87.376,57.023 87.863,56.536 74LS273.19
Net555_2: 555.2 555.6 C3.1 R2.2 | length 36.2
  Top Layer w0.5: 555.2 13.116,30.953 13.589,30.48 13.589,28.614 ; R2.2@15.24,8.849 13.719,8.849 13.208,9.36 13.208,15.621 12.888,15.941 C3.1 10.668,15.968 10.668,17.145 11.176,17.653 13.296,17.653 13.589,17.946 13.589,28.614 ; 555.6 18.17,28.321 13.882,28.321 13.589,28.614
Net555_5: 555.5 C4.1 | length 11.9
  Top Layer w0.5: C4.1 17.973,15.941 18.288,16.256 18.288,25.846 555.5
Net555_7: 555.7 R1.1 R2.1 | length 35.8
  Top Layer w0.5: R1.1@10.642,8.849 11.598,8.849 13.098,7.349 15.24,7.349 15.861,7.349 15.877,7.366 17.614,7.366 17.907,7.659 17.907,13.423 18.2,13.716 20.281,13.716 20.574,14.009 20.574,30.695 20.281,30.988 18.297,30.988 555.7
NetAT28C16-15PC_9: AT28C16-15PC.9 DS1.3 DS2.3 DS3.3 DS4.3 | length 184.2
  Top Layer w0.5: AT28C16-15PC.9 50.262,61.659 49.969,61.952 35.266,61.952 34.973,61.659 34.973,21.288 35.523,20.738 DS1.3 37.572,20.701 41.275,20.701 41.656,20.32 41.656,7.532 41.949,7.239 47.483,7.239 47.776,7.532 47.776,19.836 48.641,20.701 DS2.3@51.084,20.701 ; DS2.3 51.166,20.656 55.073,20.656 56.002,19.727 56.002,7.532 56.295,7.239 61.707,7.239 62,7.532 62,20.344 62.59,20.934 65.11,20.934 DS3.3 65.396,20.828 68.326,20.828 69.723,19.431 69.723,7.239 70.128,6.834 76.566,6.834 76.859,7.127 76.859,20.09 77.507,20.738 DS4.3
NetAT28C16-15PC_10: AT28C16-15PC.10 DS1.2 DS2.2 DS3.2 DS4.2 | length 157.3
  Top Layer w0.5: DS1.2 37.593,23.337 39.046,23.337 39.243,23.534 39.243,27.774 38.95,28.067 36.957,28.067 36.473,28.551 36.473,60.159 36.766,60.452 47.419,60.452 47.712,60.159 AT28C16-15PC.10
  Bottom Layer w0.5: DS1.2 37.572,23.241 39.624,23.241 40.386,22.479 40.386,12.993 40.679,12.7 48.729,12.7 49.022,12.993 49.022,22.948 49.315,23.241 51.046,23.241 DS2.2 53.618,23.278 54.102,22.794 54.102,13.12 54.395,12.827 62.826,12.827 63.119,13.12 63.119,22.79 63.412,23.082 65.11,23.082 DS3.2 67.654,23.278 68.199,22.733 68.199,14.097 69.176,13.12 77.304,13.12 77.597,13.413 77.597,22.948 77.89,23.241 DS4.2@80.235,23.241
NetAT28C16-15PC_11: AT28C16-15PC.11 DS1.4 DS2.4 DS3.4 DS4.4 | length 186.9
  Top Layer w0.5: v1(45.212,64.516) 33.782,64.516 33.147,63.881 33.147,18.491 33.44,18.198 39.585,18.198 39.878,17.906 39.878,5.627 40.171,5.334 48.983,5.334 49.276,5.627 49.276,17.841 49.569,18.133 51.019,18.133 DS2.4 53.176,18.198 53.594,17.78 53.594,5.969 54.102,5.461 62.865,5.461 63.5,6.096 63.5,17.906 63.793,18.198 DS3.4 67.779,18.198 68.072,17.906 68.072,5.842 68.707,5.207 78.066,5.207 78.359,5.5 78.359,17.906 78.652,18.198 DS4.4
  Bottom Layer w0.5: AT28C16-15PC.11 45.187,57.048 45.187,64.491 v1(45.212,64.516)
NetAT28C16-15PC_13: AT28C16-15PC.13 DS1.5 DS2.5 DS3.5 DS4.5 | length 127.7
  Top Layer w0.5: DS1.5 37.534,3.976 37.827,3.683 51.084,3.683 ; DS2.5 51.084,3.683 ; DS3.5 65.278,15.63 65.278,3.683 ; DS4.5 80.241,15.653 81.368,15.653 81.661,15.36 81.661,3.976 81.368,3.683 65.278,3.683 ; 51.084,3.683 65.278,3.683
  Bottom Layer w0.5: DS1.5 37.338,15.854 35.853,15.854 35.56,16.147 35.56,41.53 35.853,41.823 AT28C16-15PC.13
NetAT28C16-15PC_14: AT28C16-15PC.14 DS1.8 DS2.8 DS3.8 DS4.8 | length 75.5
  Top Layer w0.5: DS1.8 46.392,20.738 50.198,24.544 53.307,24.544 57.113,20.738 DS2.8 59.854,20.738 63.66,24.544 67.404,24.544 71.21,20.738 DS3.8 74.713,20.738 78.519,24.544 82.779,24.544 86.585,20.738 DS4.8
  Bottom Layer w0.5: DS1.8 44.958,20.934 43.679,20.934 43.386,21.227 43.386,27.257 45.162,29.033 AT28C16-15PC.14
NetAT28C16-15PC_15: AT28C16-15PC.15 DS1.9 DS2.9 DS3.9 DS4.9 | length 86.9
  Top Layer w0.5: DS1.9 45.019,23.414 42.753,23.414 42.291,23.876 42.291,31.75 42.799,32.258 47.117,32.258 47.712,32.853 AT28C16-15PC.15 ; DS1.9@45.884,23.278 50.165,27.559 50.546,27.94 54.864,27.94 55.499,27.305 55.499,24.943 57.163,23.278 59.27,23.278 60.452,24.46 60.452,28.028 60.745,28.321 69.863,28.321 70.156,28.028 70.156,24.778 71.656,23.278 DS3.9@72.507,23.278 ; DS3.9 74.078,23.278 79.145,28.345 84.353,28.345 84.645,28.052 84.645,24.829 86.196,23.278 DS4.9
NetAT28C16-15PC_16: AT28C16-15PC.16 DS1.10 DS2.10 DS3.10 DS4.10 | length 70.6
  Top Layer w0.5: DS1.10 45.154,29.552 45.447,29.845 49.86,29.845 ; 49.909,29.894 49.86,29.845 ; 49.909,29.972 49.909,40.63 50.262,40.984 AT28C16-15PC.16 ; DS2.10 58.547,25.975 58.547,29.845 ; DS3.10 72.926,29.845 ; DS4.10 87.884,25.847 87.884,29.552 87.591,29.845 72.926,29.845 ; 49.86,29.845 58.547,29.845 ; 58.547,29.845 72.926,29.845
NetAT28C16-15PC_17: AT28C16-15PC.17 DS1.7 DS2.7 DS3.7 DS4.7 | length 144.3
  Top Layer w0.5: DS1.7 44.958,18.002 43.727,18.002 43.434,17.71 43.434,10.453 43.727,10.16 v1(45.212,10.16) ; AT28C16-15PC.17 52.812,32.932 53.105,32.639 89.496,32.639 89.789,32.346 89.789,18.454 89.51,18.175 87.879,18.175 87.766,18.288 85.217,18.288 84.836,17.907 v1(84.836,10.414) ; v1(58.674,10.16) 60.159,10.16 60.452,10.453 60.452,17.74 60.159,18.033 58.869,18.033 DS2.7 ; DS3.7 72.963,18.161 74.394,18.161 74.93,17.625 v1(74.93,10.287)
  Bottom Layer w0.5: v1(45.212,10.16) v1(58.674,10.16) 74.803,10.16 v1(74.93,10.287) 84.709,10.287 v1(84.836,10.414)
NetAT28C16-15PC_19: AT28C16-15PC.19 SW.2 | length 64.5
  Top Layer w0.5: v1(38.481,44.196) 57.404,44.196 57.811,43.789 57.811,41.924 AT28C16-15PC.19
  Bottom Layer w0.5: SW.2 27.74,10.922 32.766,10.922 33.909,12.065 33.909,43.561 34.544,44.196 v1(38.481,44.196)
NetR3_1: R3.1 SW.1 | length 11.5
  Top Layer w0.5: R3.1@20.612,8.849 24.98,8.849 25.273,9.142 25.273,13.296 25.566,13.589 27.613,13.589 SW.1
VCC: 74LS08.14 74LS107_1.1 74LS107_1.4 74LS107_1.13 74LS107_1.14 74LS107_2.8 74LS107_2.10 74LS107_2.11 74LS107_2.14 74LS139_1.16 74LS273.20 555.8 AT28C16-15PC.21 AT28C16-15PC.24 C1.1 POWER_IN.1 R1.2 SW.3 | length 470
  Top Layer w1: C1.1 POWER_IN.1 3.432,63.926 5.383,63.926 5.969,64.512 5.969,66.216 6.555,66.802 28.328,66.802 ; R1.2@10.642,7.099 10.642,5.868 11.303,5.207 27.051,5.207 27.702,5.858 SW.3 ; 555.8 18.295,33.526 31.115,33.526 ; SW.3@27.708,8.425 30.529,8.425 31.115,9.011 31.115,33.526 ; AT28C16-15PC.21 63.05,41.861 63.05,44.245 63.636,44.831 70.076,44.831 70.662,44.245 AT28C16-15PC.24 70.624,41.785 70.624,38.305 71.21,37.719 106.665,37.719 ; 74LS139_1.16 106.665,37.719 ; 74LS107_2.8 126.763,11.666 128.7,11.666 129.286,12.252 129.286,15.924 128.774,16.437 126.763,16.437 74LS107_2.10 74LS107_2.11 126.763,19.166 128.446,19.166 129.032,19.752 129.032,25.957 128.553,26.437 126.763,26.437 74LS107_2.14 ; 74LS107_2.14@126.723,26.551 126.746,26.575 126.746,37.719 ; 74LS107_1.4 139.939,19.166 141.654,19.166 142.24,19.752 142.24,26.551 ; 74LS107_1.1 142.24,26.551 ; 74LS107_1.13 74LS107_1.14 ; 28.328,66.802 146.734,66.802 147.32,66.216 147.32,37.719 ; 28.328,66.802 74LS08.14 28.443,61.112 30.529,61.112 31.115,60.526 31.115,33.526 ; 106.665,37.719 126.746,37.719 ; 126.746,37.719 147.32,37.719 ; 142.24,26.551 74LS107_1.14 ; 147.32,37.719 147.32,26.656 74LS107_1.14
  Bottom Layer w1: AT28C16-15PC.24 81.701,41.823 82.296,42.418 82.296,50.01 82.882,50.596 74LS273.20
pads on no net: 74LS08.4 74LS08.5 74LS08.6 74LS08.8 74LS08.9 74LS08.10 74LS08.11 74LS08.12 74LS08.13 74LS107_1.3 74LS107_1.5 74LS107_1.6 74LS107_1.8 74LS107_1.9 74LS107_1.10 74LS107_1.11 74LS107_2.1 74LS107_2.2 74LS107_2.3 74LS107_2.4 74LS107_2.5 74LS107_2.12 74LS107_2.13 74LS139_1.9 74LS139_1.10 74LS139_1.11 74LS139_1.12 74LS139_1.13 74LS139_1.14 74LS139_1.15 555.4
copper on no net:
  other v2: 2.54,2.54 157.353,2.54 2.54,70.104 157.353,70.104

## Polygon pours and split planes (outlines as drawn)
GND on Top Layer "GND_L01_P000" (solid, remove dead copper, pour order 0): 0,72.644 0,0 159.893,0 159.893,72.644
no net on Top Layer "NONET_L01_P001" (solid, pour order 1): 0.889,71.755
GND on Bottom Layer "GND_L02_P002" (solid, remove dead copper, pour order 2): 0,72.644 0,0 159.893,0 159.893,72.644

## Other copper
Top Layer:
  text "Output register" at 126.873,4.699 h3.5
  text "Made by Johan" at 126.873,1.524 h3

## Silkscreen, mask and mechanical layers (free items; w line width, h text height)
Top Overlay:
  text "7" at 145.542,59.944 h1.52
  text "6" at 145.542,57.277 h1.52
  text "5" at 145.542,54.737 h1.52
  text "4" at 145.542,52.197 h1.52
  text "3" at 145.542,49.657 h1.52
  text "CLR'" at 7.112,49.403 h1.52
  text "2" at 145.542,47.117 h1.52
  text "CLK" at 7.239,46.736 h1.52
  text "1" at 145.542,44.577 h1.52
  text "OI" at 7.239,44.069 h1.52
  text "0" at 145.542,42.164 h1.52